# EAGLE board alarm (EAGLE 9.6.2)
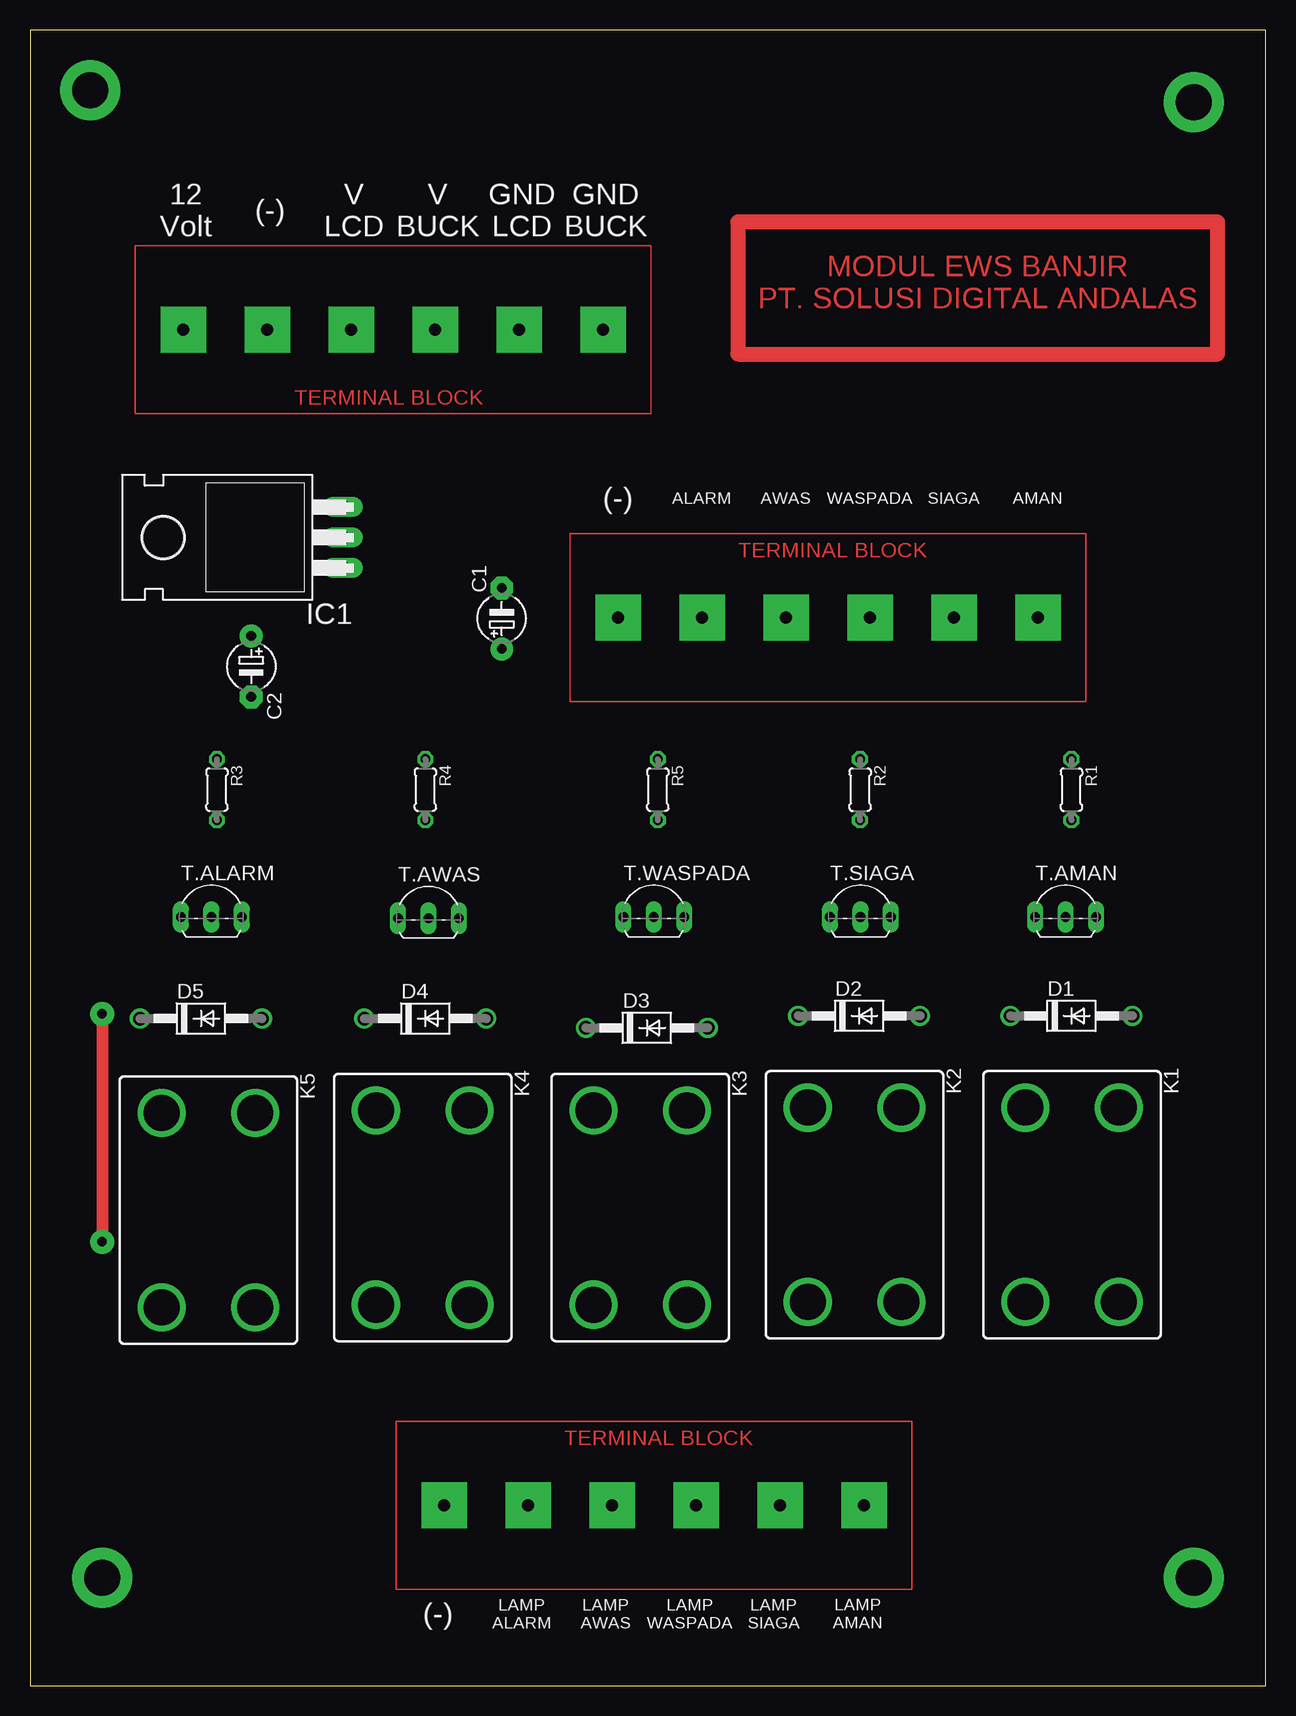
[diagram p0: board, top side]
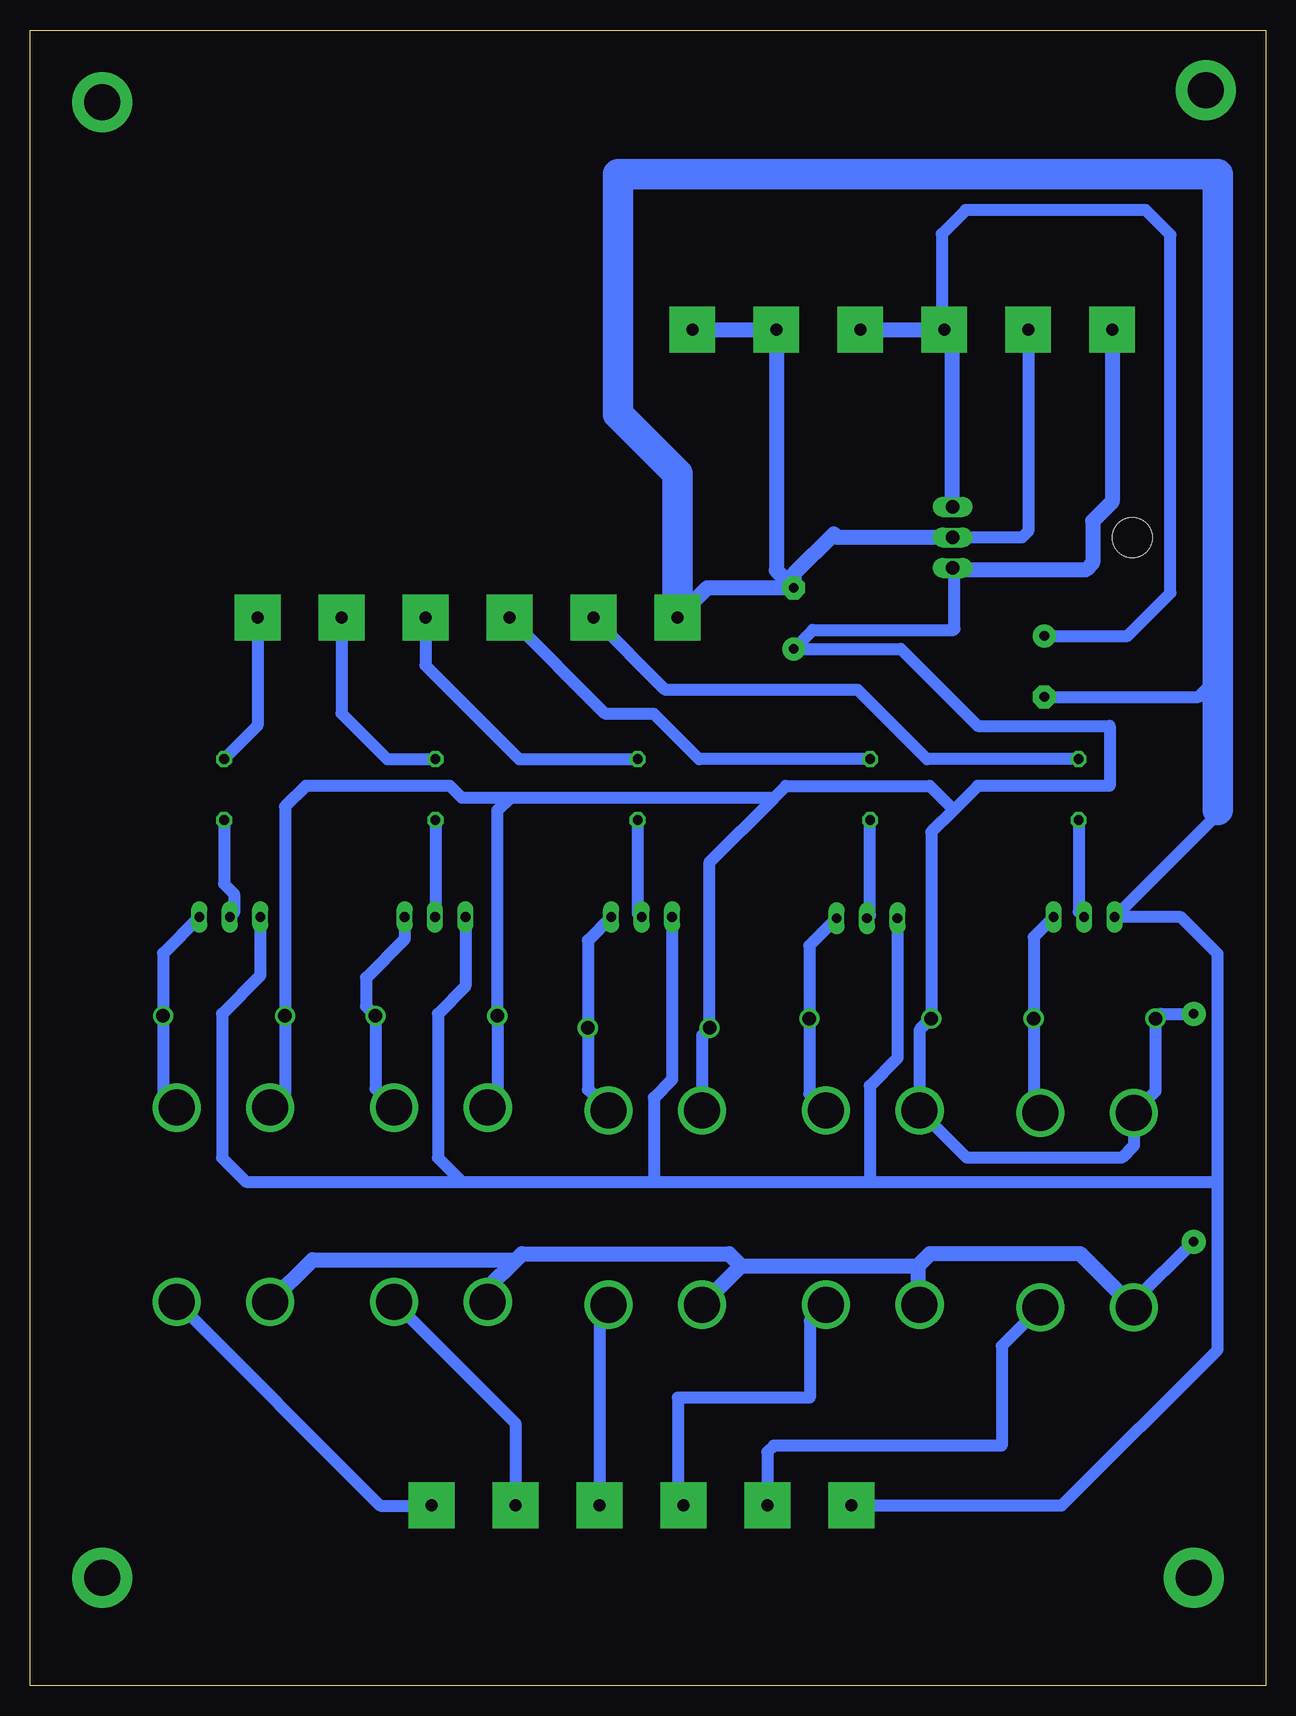
[diagram p1: board, bottom side, seen from below]

Size 103 x 138 mm. Coordinates in mm from the lower left corner, seen from the top.
Outline: 0,0 103,0 103,138 0,138 0,0
Copper layers (1*16): Top 0.035mm / dielectric 1.5mm / Bottom 0.035mm
Design rules "default": minimum track width 6mil, minimum drill 0.35mm, track to track 6mil, track to pad 6mil, pad to pad 6mil, via to via 6mil, smd to smd 6mil, copper to edge 40mil, drill to drill 6mil, minimum pad ring 10mil, minimum via ring 8mil, stop-mask expansion 4mil, vias tented up to drill 0mil, thermal gap 10mil

## Footprints (pad centres in the part's own frame; a part is rotated, then mirrored left to right if it is on the bottom)
E5-4 = drill 0.813 pad 1.905: + -2.54,0 | drill 0.813 pad 1.905 octagon: - 2.54,0
DO41-10 = drill 1.118: A 5.08,0; C -5.08,0
TO220H = drill 1.118 long: 1 -2.54,-10.16; 2 0,-10.16; 3 2.54,-10.16 | hole 3.302: 0,4.826
CV1A-MICRO-280 = drill 3: 30 -8.1,-3.9; 85 -8.1,3.9; 86 8.1,-3.9; 87 8.1,3.9
0204/5 = drill 0.813 octagon: 1 -2.54,0; 2 2.54,0
TO92-EBC = drill 0.813 long: B 0,-1.27; C 2.54,-1.27; E -2.54,-1.27
TERMINAL-BLOCK-6-PIN = drill 1 pad 3.81 square: P1 -7,7; P2 -7,0; P3 -7,-7; P4 -7,-14; P5 -7,-21; P6 -7,-28

## Placement (x,y rotation side)
C1  [E5-4]  39.33,88.95 90 top
C2  [E5-4]  18.44,84.95 270 top
D1  1N4004  [DO41-10]  86.82,55.82 0 top
D2  1N4004  [DO41-10]  69.12,55.82 0 top
D3  1N4004  [DO41-10]  51.42,54.82 0 top
D4  1N4004  [DO41-10]  32.95,55.6 0 top
D5  1N4004  [DO41-10]  14.25,55.6 0 top
IC1  7805T  [TO220H]  15.93,95.7 90 top
K1  CV33012  [CV1A-MICRO-280]  86.87,40.07 270 top
K2  CV33012  [CV1A-MICRO-280]  68.74,40.07 270 top
K3  CV33012  [CV1A-MICRO-280]  50.87,39.85 270 top
K4  CV33012  [CV1A-MICRO-280]  32.74,39.85 270 top
K5  CV33012  [CV1A-MICRO-280]  14.87,39.63 270 top
R1  [0204/5]  86.82,74.68 270 top
R2  [0204/5]  69.2,74.68 270 top
R3  [0204/5]  15.58,74.68 270 top
R4  [0204/5]  32.96,74.68 270 top
R5  [0204/5]  52.34,74.68 270 top
T.ALARM  [TO92-EBC]  15.12,65.33 0 top
T.AMAN  [TO92-EBC]  86.34,65.33 0 top
T.AWAS  [TO92-EBC]  33.22,65.22 0 top
T.SIAGA  [TO92-EBC]  69.23,65.33 0 top
T.WASPADA  [TO92-EBC]  52.01,65.33 0 top
U$1  TERMINAL-BLOCK-6-PIN  [TERMINAL-BLOCK-6-PIN]  62.53,8.02 270 top
U$6  TERMINAL-BLOCK-6-PIN  [TERMINAL-BLOCK-6-PIN]  77.03,82.02 270 top
U$7  TERMINAL-BLOCK-6-PIN  [TERMINAL-BLOCK-6-PIN]  19.79,120.02 90 top

## Library data of the parts
C1 C2 = rcl; SPICEPREFIX: C
D1-D5 = diode
IC1 = linear
K1-K5 = relay; MPN: ACV33012; OC_FARNELL: unknown; OC_NEWARK: 39M3505
R1-R5 = rcl; SPICEPREFIX: R
T.ALARM T.AMAN T.AWAS T.SIAGA T.WASPADA = transistor-neu-to92
U$1 U$6 U$7 = TERMINAL-BLOCK-6-PIN

## Nets
+12V: C1.+ D1.C D2.C D3.C D4.C D5.C IC1.1 K1.30 K1.86 K2.30 K2.86 K3.30 K3.86 K4.30 K4.86 K5.30 K5.86 U$7.P1
GNDA: C1.- C2.- IC1.2 T.ALARM.E T.AMAN.E T.AWAS.E T.SIAGA.E T.WASPADA.E U$1.P6 U$6.P6 U$7.P2 U$7.P5 U$7.P6
N$1: K1.87 U$1.P1
N$2: R1.2 T.AMAN.B
N$3: R1.1 U$6.P1
N$4: R2.2 T.SIAGA.B
N$5: R5.2 T.WASPADA.B
N$6: R4.2 T.AWAS.B
N$7: R3.2 T.ALARM.B
N$8: K2.87 U$1.P2
N$9: D5.A K5.85 T.ALARM.C
N$10: K3.87 U$1.P3
N$11: K4.87 U$1.P4
N$12: K5.87 U$1.P5
N$13: R2.1 U$6.P2
N$14: R5.1 U$6.P3
N$15: R4.1 U$6.P4
N$16: R3.1 U$6.P5
N$17: C2.+ IC1.3 U$7.P3 U$7.P4
N$27: D1.A K1.85 T.AMAN.C
N$29: D4.A K4.85 T.AWAS.C
N$31: D3.A K3.85 T.WASPADA.C
N$32: D2.A K2.85 T.SIAGA.C

## Tracks (layer width: path | path; a pad name or v marks a point on that pad's centre or on a via)
+12V  (via drill 0.8 pad 2)
  Top 1.016: v6,56 v6,37
  Bottom 1.016: 25.93,93 25.93,88.07 26,88 37.74,88 C1.+ 30.41,86.41 24,80 13,80 13,75 24,75 26,73 | 26,73 27.87,71.13 D4.C 28.84,54.63 K4.30 24.89,44 12,44 10.97,45.03 K5.30 9.17,49.53 D5.C 8.77,56 v6,56 | K3.30 46.97,54.19 D3.C 46.34,68.66 41,74 | 26,73 28,75 40,75 41,74 | K1.30 83,48.14 83,48 81.74,49.26 D1.C 81.74,73.26 80,75 68,75 67,74 63,74 | K2.30 64.04,48.97 D2.C 64.04,72.96 63,74 | 41,74 63,74 | v6,37 10.97,32.03 K5.86
  Bottom 1.27: U$7.P1 12.79,98.68 14.41,97.07 14.41,93.59 15,93 25.93,93 IC1.1 | K5.86 15.44,36 28,36 29,35 | K4.86 29,31.91 29,35 | K3.86 43.72,35 | 43.72,35 29,35 | K2.86 64.84,33.16 62.5,35.5 | 62.5,35.5 62,36 44.72,36 43.72,35 | K1.86 79.44,35.5 62.5,35.5
GNDA
  Bottom 1.016: U$7.P2 19.79,96.21 20.3,95.7 IC1.2 | 4,73 4,72.64 T.ALARM.E 7.06,64.06 4,61 4,42 | C2.- 5.59,82.41 4,84 | T.AWAS.E 30.68,52.32 33,50 33,42 | 33,42 4,42 | T.WASPADA.E 49.47,50.53 51,49 51,42 | 51,42 33,42 | T.SIAGA.E 66.69,58.31 69,56 69,44 67,42 | 67,42 51,42 | T.AMAN.E 83.8,59.2 87,56 87,44 85,42 67,42 | U$1.P6 16.98,15.02 4,28 4,42
  Bottom 1.27: IC1.2 35.7,95.7 36,96 39.33,92.67 C1.- | C1.- 46.56,91.49 U$6.P6 | C1.- 40.79,92.95 U$7.P5 U$7.P6
  Bottom 2.54: U$6.P6 49.03,101.03 54,106 54,126 4,126 4,84 4,73
N$1
  Bottom 1.016: K1.87 73.8,15 69.55,15 U$1.P1
N$2
  Bottom 1.016: R1.2 86.82,66.82 86,66 86,64.4 T.AMAN.B
N$3
  Bottom 1.016: U$6.P1 84.03,80.01 R1.1
N$4
  Bottom 1.016: R2.2 69.2,64.09 T.SIAGA.B
N$5
  Bottom 1.016: R5.2 52.34,64.39 T.WASPADA.B
N$6
  Bottom 1.016: T.AWAS.B 32.96,64.21 R4.2
N$7
  Bottom 1.016: R3.2 15.58,64.52 T.ALARM.B
N$8
  Bottom 1.016: K2.87 62.53,21.86 U$1.P2
N$9
  Bottom 1.016: T.ALARM.C 19.33,62.39 D5.A 19.33,48.29 K5.85
N$10
  Bottom 1.016: K3.87 55.53,30.99 U$1.P3
N$11
  Bottom 1.016: K4.87 38,30.39 38,24 49,24 49,15.49 U$1.P4
N$12  (via drill 1 pad 3)
  Bottom 1.016: K5.87 v18.8,31.5 22,28.3 22,20 41,20 41.53,19.47 U$1.P5
N$13
  Bottom 1.016: U$6.P2 77.03,81.03 73.22,77.22 R2.1
N$14
  Bottom 1.016: U$6.P3 70.03,85.03 62.22,77.22 R5.1
N$15
  Bottom 1.016: R4.1 47.22,77.22 51,81 55.01,81 U$6.P4
N$16
  Bottom 1.016: R3.1 28.22,77.22 34,83 50.01,83 U$6.P5
N$17
  Bottom 1.016: C2.+ 11.51,87.49 7.93,91.07 7.93,120.93 10,123 25,123 27,121 27,113.23 U$7.P3
  Bottom 1.27: IC1.3 26.09,112.32 U$7.P3 U$7.P4
N$18
  Top 1.27: 59,122 59,111 99,111 99,122 59,122
N$19  (via drill 3 pad 5)
  other vias: 6,9
N$20  (via drill 3 pad 5)
  other vias: 97,9
N$21  (via drill 3 pad 5)
  other vias: 5,133
N$23  (via drill 3 pad 5)
  other vias: 97,132
N$24  (via drill 1 pad 3)
  other vias: 11,47.7
N$25  (via drill 1 pad 3)
  other vias: 18.8,47.7
N$26  (via drill 1 pad 3)
  other vias: 11,31.5
N$27
  Bottom 1.016: K1.85 91.9,49.3 D1.A 91.9,61.04 T.AMAN.C
N$28  (via drill 1 pad 3)
  other vias: 28.8,31.8
N$29
  Bottom 1.016: K4.85 38.03,49.34 D4.A 38.03,61.68 T.AWAS.C
N$30  (via drill 1 pad 3)
  other vias: 28.9,48.1
N$31
  Bottom 1.016: T.WASPADA.C 56.5,62.11 D3.A 56.5,49.68 K3.85
N$32
  Bottom 1.016: T.SIAGA.C 71.77,62.23 75,59 75,56.62 D2.A 74.2,49.73 K2.85
N$33  (via drill 1 pad 3)
  other vias: 36.7,47.9
N$34  (via drill 1 pad 3)
  other vias: 36.7,31.7
N$35  (via drill 1 pad 3)
  other vias: 47.1,47.9
N$36  (via drill 1 pad 3)
  other vias: 54.8,47.9
N$37  (via drill 1 pad 3)
  other vias: 54.8,31.5
N$38  (via drill 1 pad 3)
  other vias: 47.1,31.6
N$39  (via drill 1 pad 3)
  other vias: 64.9,48
N$40  (via drill 1 pad 3)
  other vias: 72.6,48.3
N$41  (via drill 1 pad 3)
  other vias: 83.1,48
N$42  (via drill 1 pad 3)
  other vias: 90.7,48.2
N$43  (via drill 1 pad 3)
  other vias: 90.8,31.9
N$44  (via drill 1 pad 3)
  other vias: 83.1,31.8
N$45  (via drill 1 pad 3)
  other vias: 72.7,31.8
N$46  (via drill 1 pad 3)
  other vias: 64.9,31.8

## Text on the board
Top: MODUL EWS BANJIR / PT. SOLUSI DIGITAL ANDALAS
tNames: 12 / Volt | (-) | V / LCD | V / BUCK | GND / LCD | GND / BUCK | (-) | ALARM | AWAS | WASPADA | SIAGA | AMAN | (-) | LAMP / ALARM | LAMP / AWAS | LAMP / WASPADA | LAMP / SIAGA | LAMP / AMAN